# EAGLE board dfp_grove (EAGLE 9.6.2)
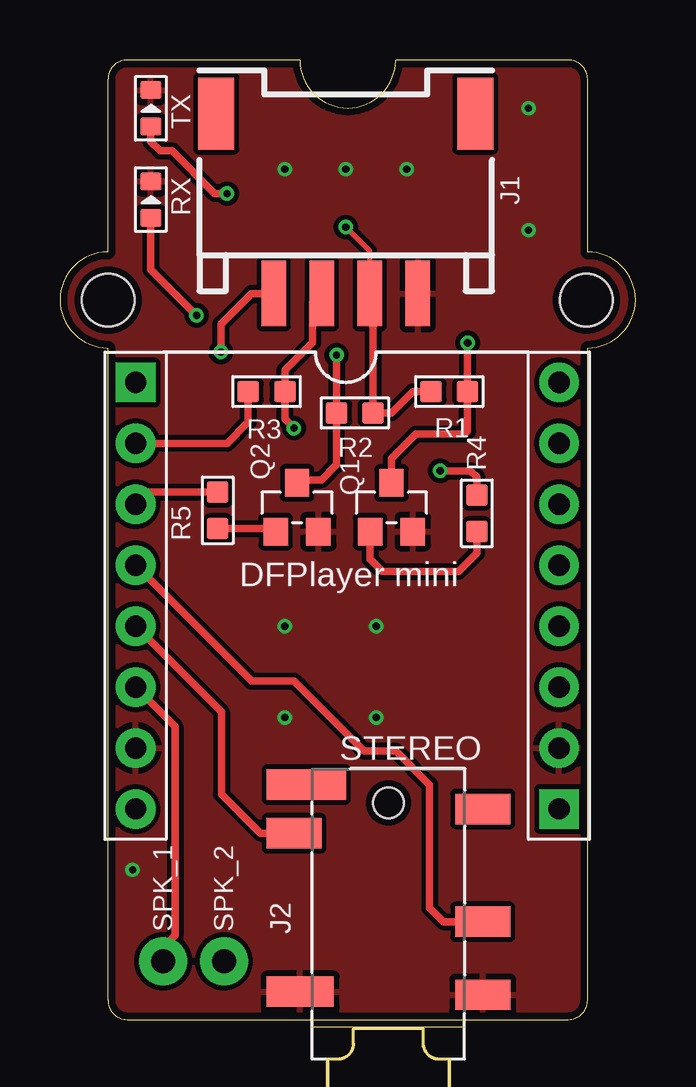
[diagram p0: board, top side]
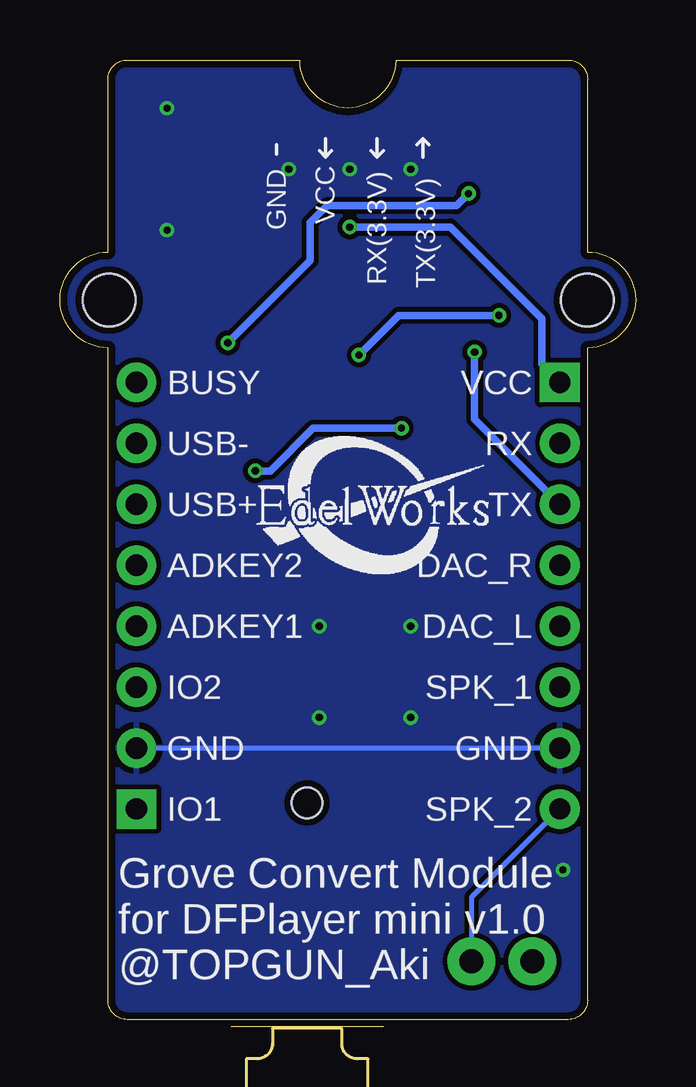
[diagram p1: board, bottom side, seen from below]

Size 24 x 40 mm. Coordinates in mm from the lower left corner, seen from the top.
Outline: 21.2,40 14,40 arc-180 10,40 2.8,40 arc90 2,39.2 2,32 arc180 2,28 2,0.8 arc90 2.8,0 21.2,0 arc90 22,0.8 22,28 arc180 22,32 22,39.2 arc90 21.2,40
Copper layers (1*16): Top 0.035mm / dielectric 1.5mm / Bottom 0.035mm
Design rules "default *": minimum track width 6mil, minimum drill 0.2mm, track to track 8mil, track to pad 8mil, pad to pad 8mil, via to via 12mil, smd to smd 8mil, copper to edge 0.3mm, drill to drill 6mil, minimum pad ring 0.15mm, minimum via ring 0.15mm, stop-mask expansion 4mil, vias tented up to drill 0mil, thermal gap 10mil
Holes 2.2 mm at 21.95,29.99 2.01,29.99

## Footprints (pad centres in the part's own frame; a part is rotated, then mirrored left to right if it is on the bottom)
LED-0603 = smd 0.762 x 0.889: + -0.762,0; - 0.762,0
HW4-SMD-2.0-90D = smd 1.01 x 2.74: 1 -3,-0.1; 2 -1,-0.1; 3 1,-0.1; 4 3,-0.1 | smd 1.5 x 3: SS1 -5.4,7.4; SS2 5.4,7.4
AUDIO6P-SMD-3.5-14.0X6.4X5.0MM = smd 1.27 x 2.286: COM1 -4.572,3.937; L -11.303,-3.937; R -7.62,3.937; RS -12.319,3.937 | smd 1.27 x 2.794: COM2 -4.699,-3.683 | smd 1.27 x 3.302: LS -13.335,-3.429 | hole 1.27: -12.573,0
H8-2.54 = drill 0.889 pad 1.651 square: 1 0,8.89 | drill 0.889 pad 1.651: 2 0,6.35; 3 0,3.81; 4 0,1.27; 5 0,-1.27; 6 0,-3.81; 7 0,-6.35; 8 0,-8.89
SOT-23 = smd 1.016 x 1.143: 1 -0.889,-1.016; 2 0.889,-1.016; 3 0,1.016
R0603 = smd 0.889 x 0.889: 1 0,0.762; 2 0,-0.762

## Placement (x,y rotation side)
D1  YELLOW-0603  [LED-0603]  3.79,37.99 90 top
D2  YELLOW-0603  [LED-0603]  3.79,34.18 90 top
J1  4P-SMD-2.0-90D  [HW4-SMD-2.0-90D]  11.92,30.37 0 top
J2  ST-PJ-312  [AUDIO6P-SMD-3.5-14.0X6.4X5.0MM]  13.7,-3.54 270 top
JP1  8p-2.54  [H8-2.54]  3.15,17.67 0 top
JP2  8p-2.54  [H8-2.54]  20.81,17.67 180 top
Q1  S8050  [SOT-23]  13.82,21.35 0 top
Q2  S8050  [SOT-23]  9.88,21.35 0 top
R1  1K 1/10W  [R0603]  16.23,26.18 270 top
R2  1K 1/10W  [R0603]  12.3,25.29 90 top
R3  1K 1/10W  [R0603]  8.62,26.18 90 top
R4  4.7K  [R0603]  17.38,21.1 0 top
R5  4.7K  [R0603]  6.58,21.22 0 top

## Library data of the parts
D1 D2 = OPL_Optoelectronics; MPN: 19-217-Y5C-AM1N1VY-3T
J1 = OPL_Connector
J2 = OPL_Connector; MPN: ST-PJ-312
JP1 JP2 = OPL_Connector; MPN: F185-1108A1BSYC1
Q1 Q2 = OPL_Discrete_Semiconductor; MPN: S8050
R1-R3 = OPL_Resistor; MPN: RC0603JR-071KL
R4 R5 = OPL_Resistor; MPN: RC0603JR-074K7L

## Nets
DAC_L: J2.L JP1.5
DAC_R: J2.R JP1.4
GND: D1.- D2.- J1.4 J2.COM1 J2.COM2 JP1.7 JP2.2 Q1.2 Q2.2
MCU_RX: J1.1 JP1.3 R5.1
MCU_TX: J1.2 R3.2 R4.1
N$1: D2.+ Q2.3 R2.1
N$2: Q2.1 R5.2
N$4: Q1.1 R4.2
N$5: D1.+ Q1.3 R1.1
N$9: JP2.8
N$10: JP2.7
N$11: JP2.6
N$12: JP2.5
N$13: JP2.4
N$14: JP2.3
N$16: JP2.1
RX: JP1.2 R3.1
SPK_1: JP1.6
SPK_2: JP1.8
VCC: J1.3 JP1.1 R1.2 R2.2

## Tracks (layer width: path | path; a pad name or v marks a point on that pad's centre or on a via)
DAC_L
  Top 0.305: JP1.5 6.73,12.82 6.73,9.39 8.37,7.76 J2.L
DAC_R
  Top 0.305: J2.R 15.98,4.08 15.41,4.65 15.41,9.79 14,11.19 12.67,11.19 9.76,14.11 7.98,14.11 JP1.4
GND  (via drill 0.3)
  Top 0.203: 17.5,1.16 J2.COM1
  Bottom 0.203: JP2.2 JP1.7
  other vias: 3.03,6.24 9.38,12.59 9.38,16.4 13.19,16.4 13.19,12.59 11.92,35.45 9.38,35.45 14.46,35.45 19.54,37.99 19.54,32.91
  pour Top: 0.49,40.53 24.62,40.53 24.62,-1.38 -0.78,-1.38 -0.78,40.53
  pour Bottom: 0.49,40.53 24.62,40.53 24.62,-1.38 -0.78,-1.38 -0.78,40.53
MCU_RX  (via drill 0.3)
  Top 0.305: J1.1 7.98,30.27 6.71,29 v6.71,27.83 | JP1.3 3.66,21.99 R5.1
  Bottom 0.305: v6.71,27.83 6.71,25.03 JP1.3
MCU_TX  (via drill 0.3)
  Top 0.305: J1.2 10.54,29.89 10.54,28.22 9.38,27.07 R3.2 9.38,25.03 v9.76,24.65 | v15.85,22.88 17.12,22.88 17.38,22.62 R4.1
  Bottom 0.305: v15.85,22.88 15.22,22.88 13.44,24.65 v9.76,24.65
N$1  (via drill 0.3)
  Top 0.305: Q2.3 10.01,22.49 10.9,22.49 11.54,23.13 R2.1 v11.54,27.7 | D2.+ 3.79,31.26 v5.69,29.35
  Bottom 0.305: v5.69,29.35 9.88,29.35 v11.54,27.7
N$2
  Top 0.305: R5.2 8.87,20.46 Q2.1
N$4
  Top 0.305: Q1.1 12.93,19.19 13.44,18.68 16.62,18.68 17.38,19.45 R4.2
N$5  (via drill 0.3)
  Top 0.305: Q1.3 13.82,23.38 14.84,24.4 16.87,24.4 17,24.53 R1.1 v17,28.21 | v6.96,34.43 6.46,34.43 4.68,36.21 4.17,36.21 3.79,36.59 D1.+
  Bottom 0.305: v6.96,34.43 7.48,33.92 12.87,33.92 13.56,33.22 13.56,31.64 v17,28.21
RX
  Top 0.305: R3.1 7.85,24.91 6.96,24.02 JP1.2
SPK_1  (via drill 1 pad 2)
  Top 0.305: v4.3,2.43 4.3,3.01 4.8,3.51 4.8,12.21 JP1.6
SPK_2  (via drill 1 pad 2)
  Bottom 0.203: JP1.8 6.84,5.09 v6.84,2.43
VCC  (via drill 0.3)
  Top 0.203: 13.06,30.12 J1.3 12.92,32.03 v11.92,33.03
  Top 0.305: 13.06,30.12 R2.2 13.82,25.29 14.71,26.18 R1.2
  Bottom 0.305: v11.92,33.03 7.73,33.03 3.92,29.22 3.92,27.32 JP1.1

## Text on the board
tPlace: TX | RX | DFPlayer mini | STEREO | SPK_1 | SPK_2
bPlace: VCC | GND | TX(3.3V) | RX(3.3V) | VCC | BUSY | RX | USB- | TX | USB+ | DAC_R | ADKEY2 | DAC_L | ADKEY1 | SPK_1 | IO2 | GND | GND | SPK_2 | IO1 | Grove Convert Module / for DFPlayer mini v1.0 / @TOPGUN_Aki